# Altium PCB MainBoard.PcbDoc
Units mil, origin at the board's own origin, x right, y up, seen from the top; angles counter-clockwise.
Board outline 1475 x 3530 mil, 8 copper layers (Top Layer, Top VCC, Top GND, Signal_1, Signal_2, Bottom GND, Bottom VCC, Bottom Layer), stack 66.302 mil thick; 64 components, 0 nets, 344 pads, 165 vias.
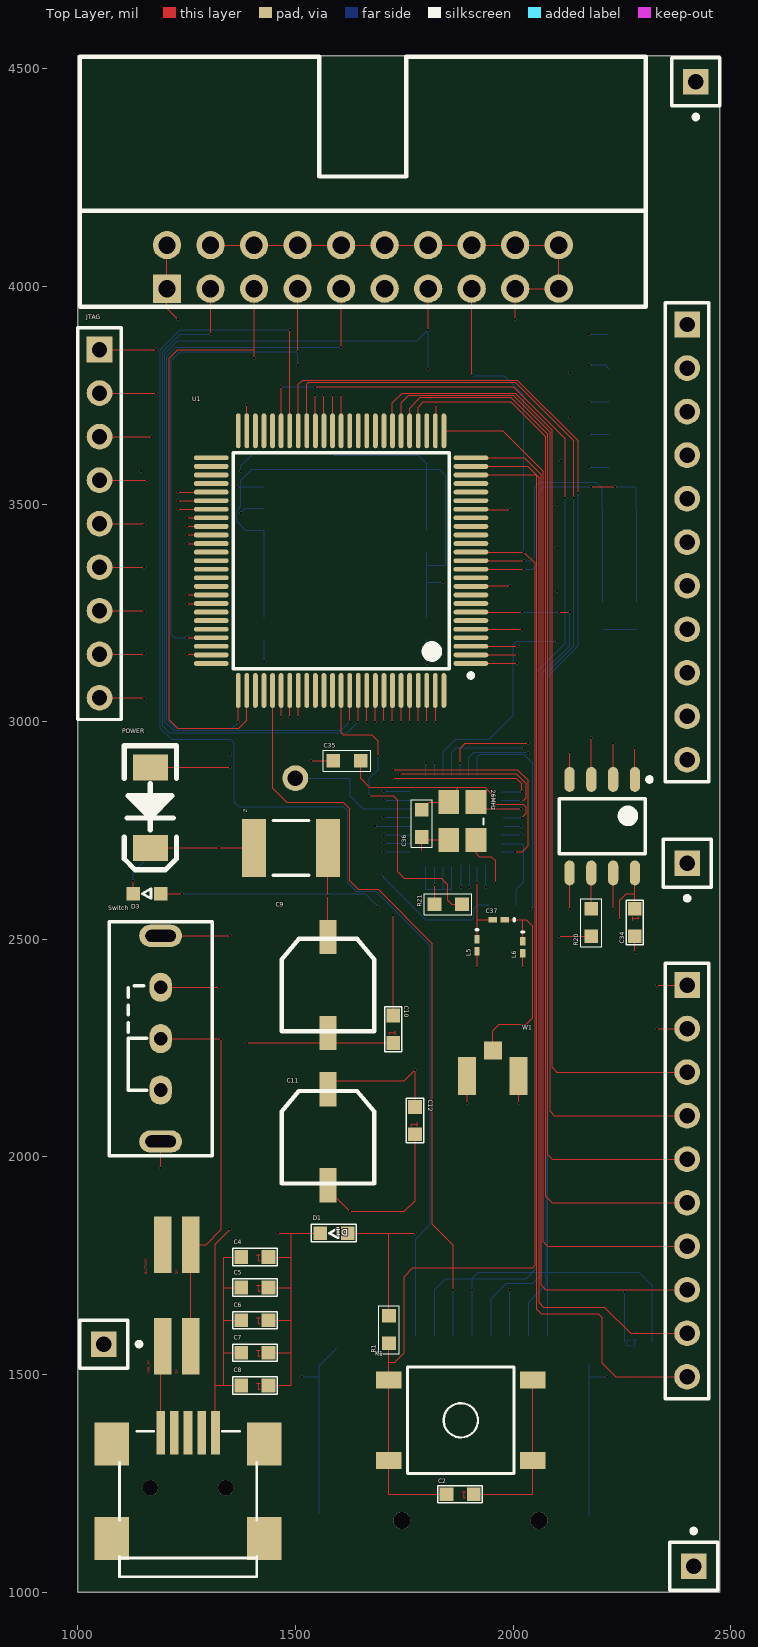
[diagram p0: Top Layer view]
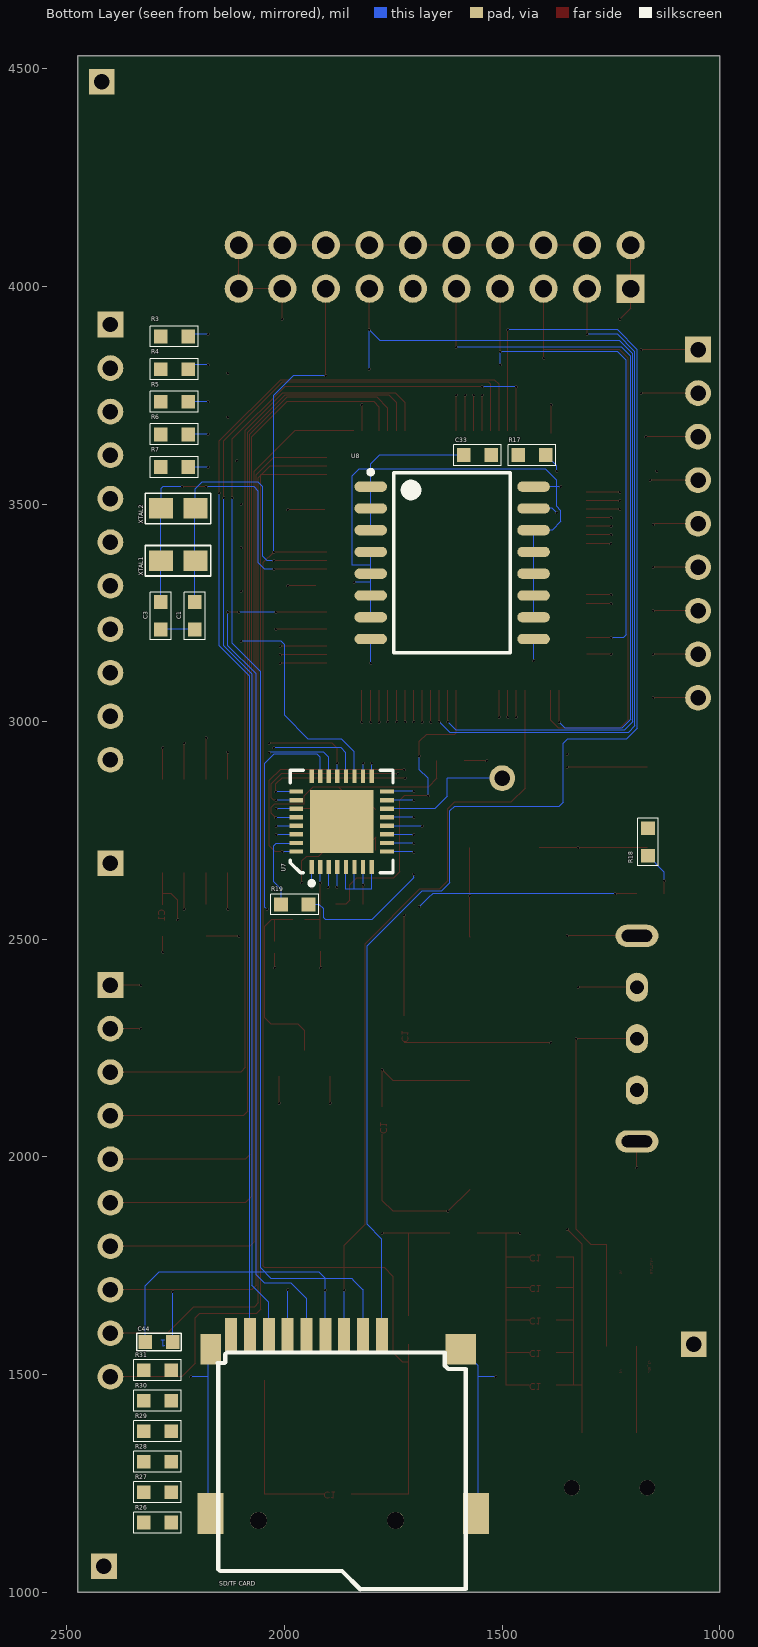
[diagram p1: Bottom Layer view, seen from below]
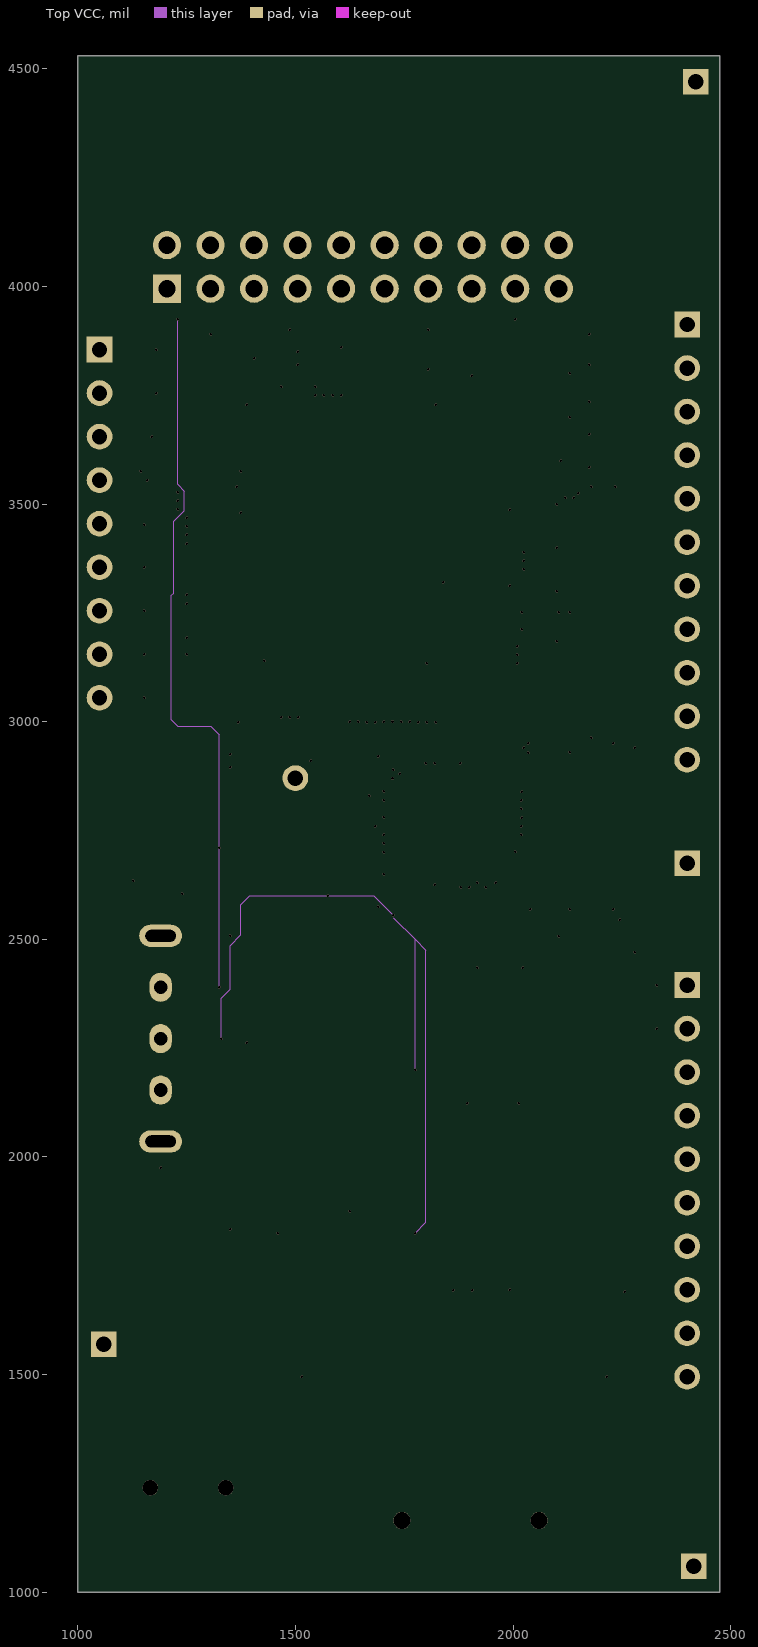
[diagram p2: Top VCC]
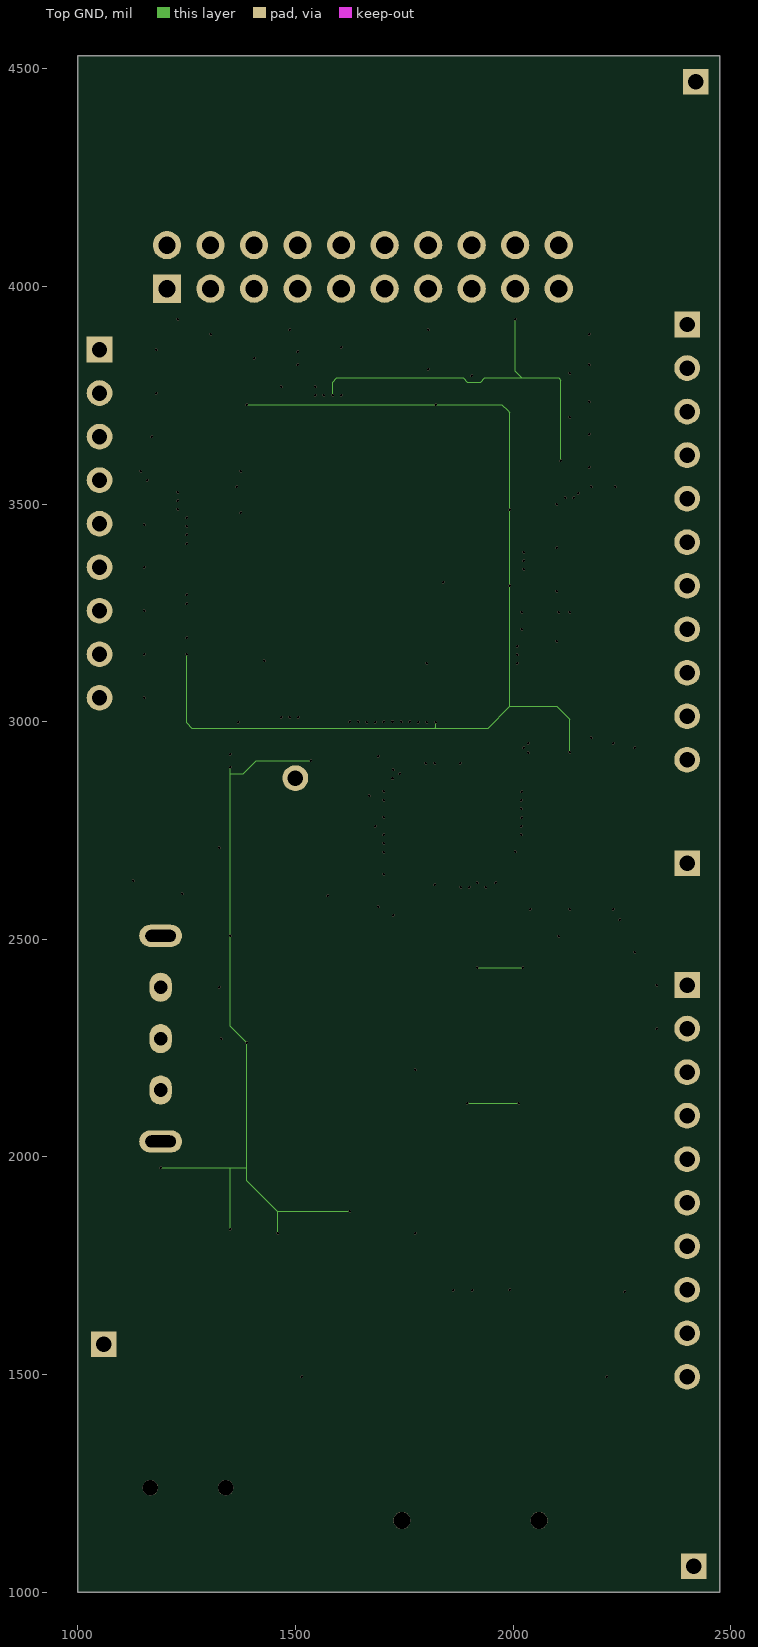
[diagram p3: Top GND]
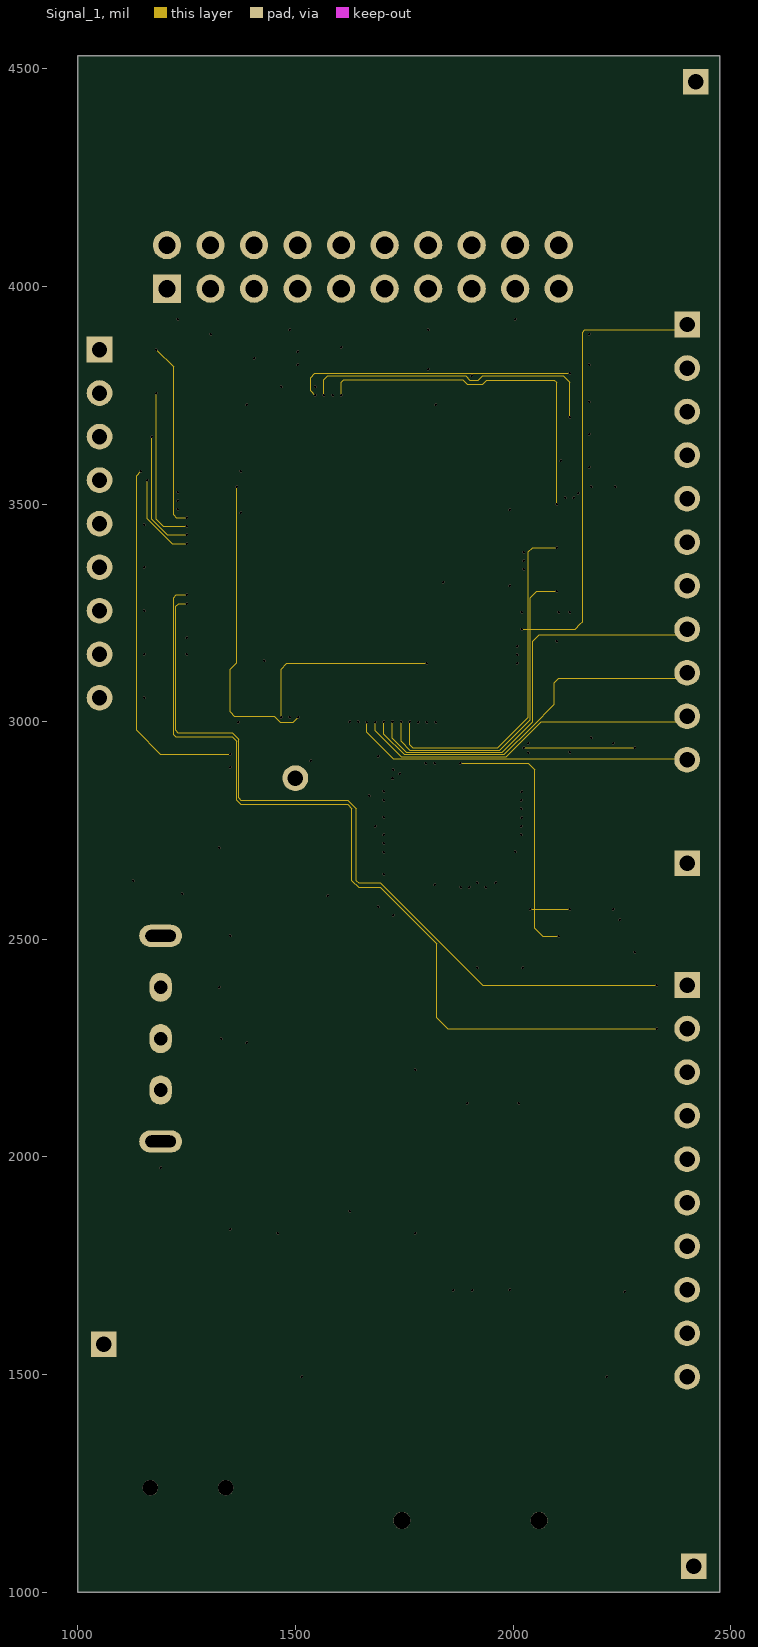
[diagram p4: Signal_1]
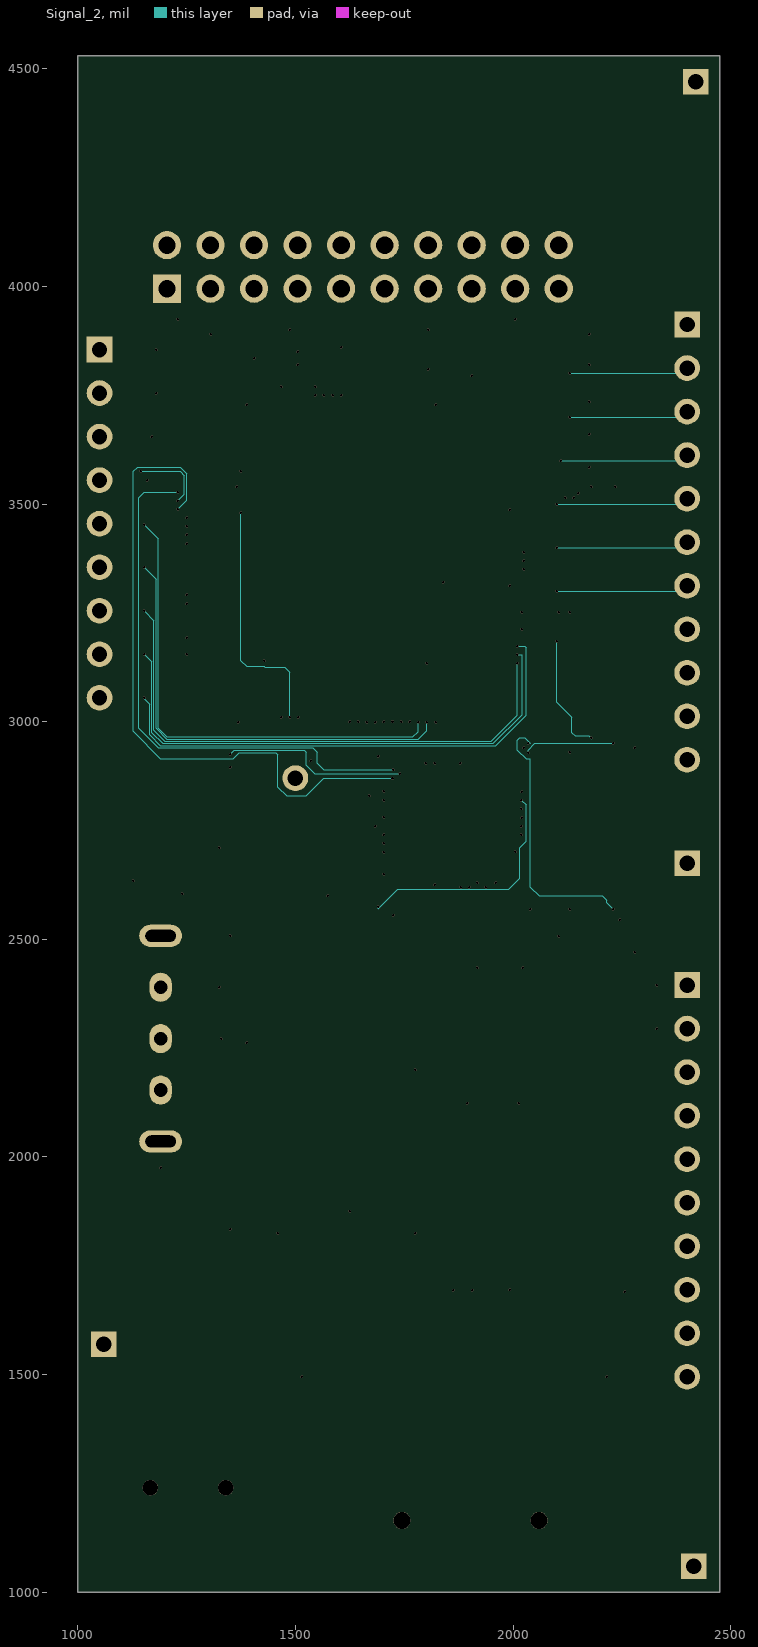
[diagram p5: Signal_2]
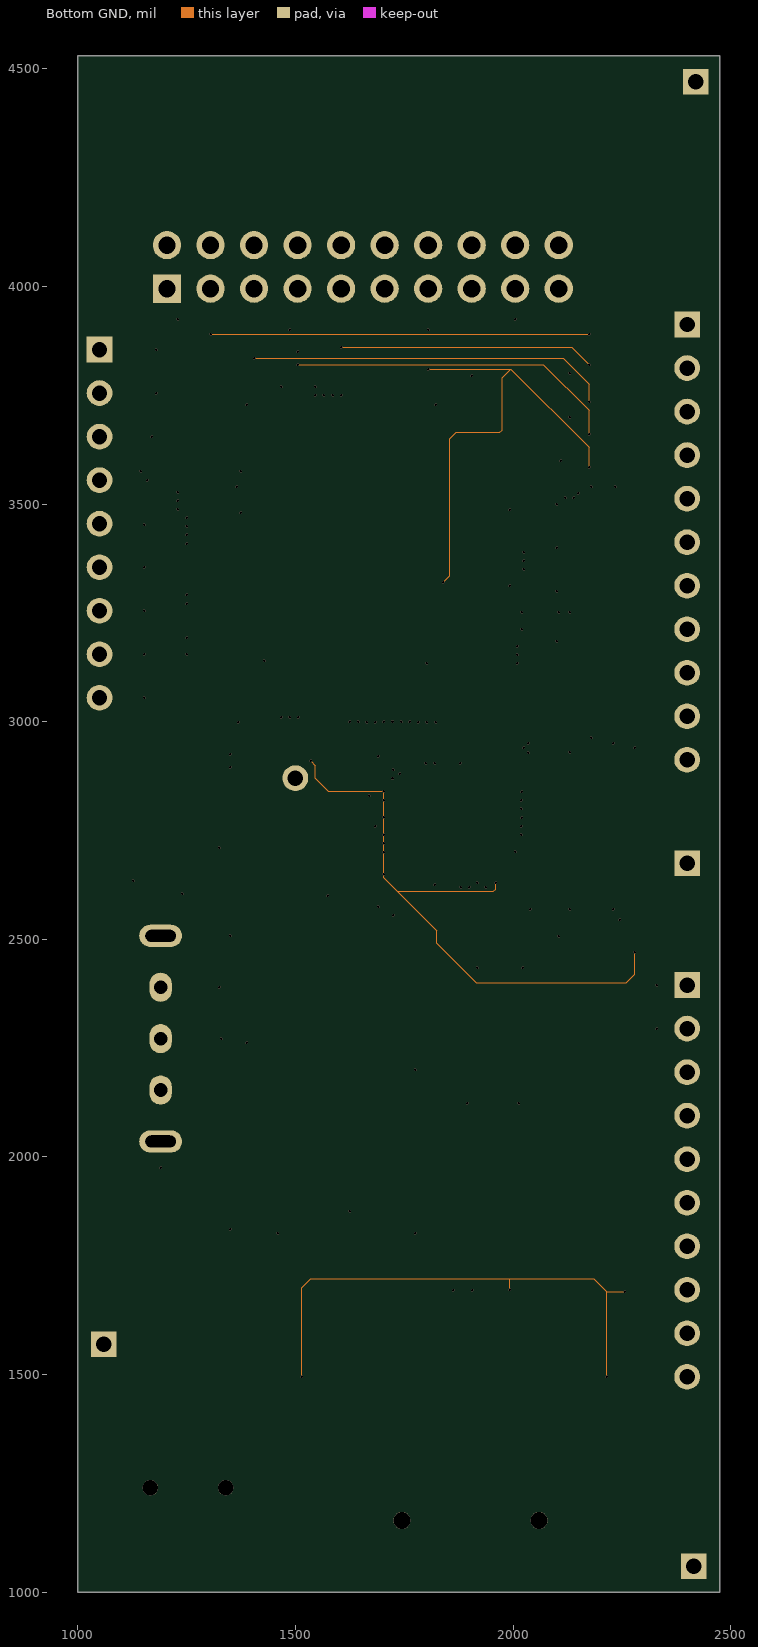
[diagram p6: Bottom GND]
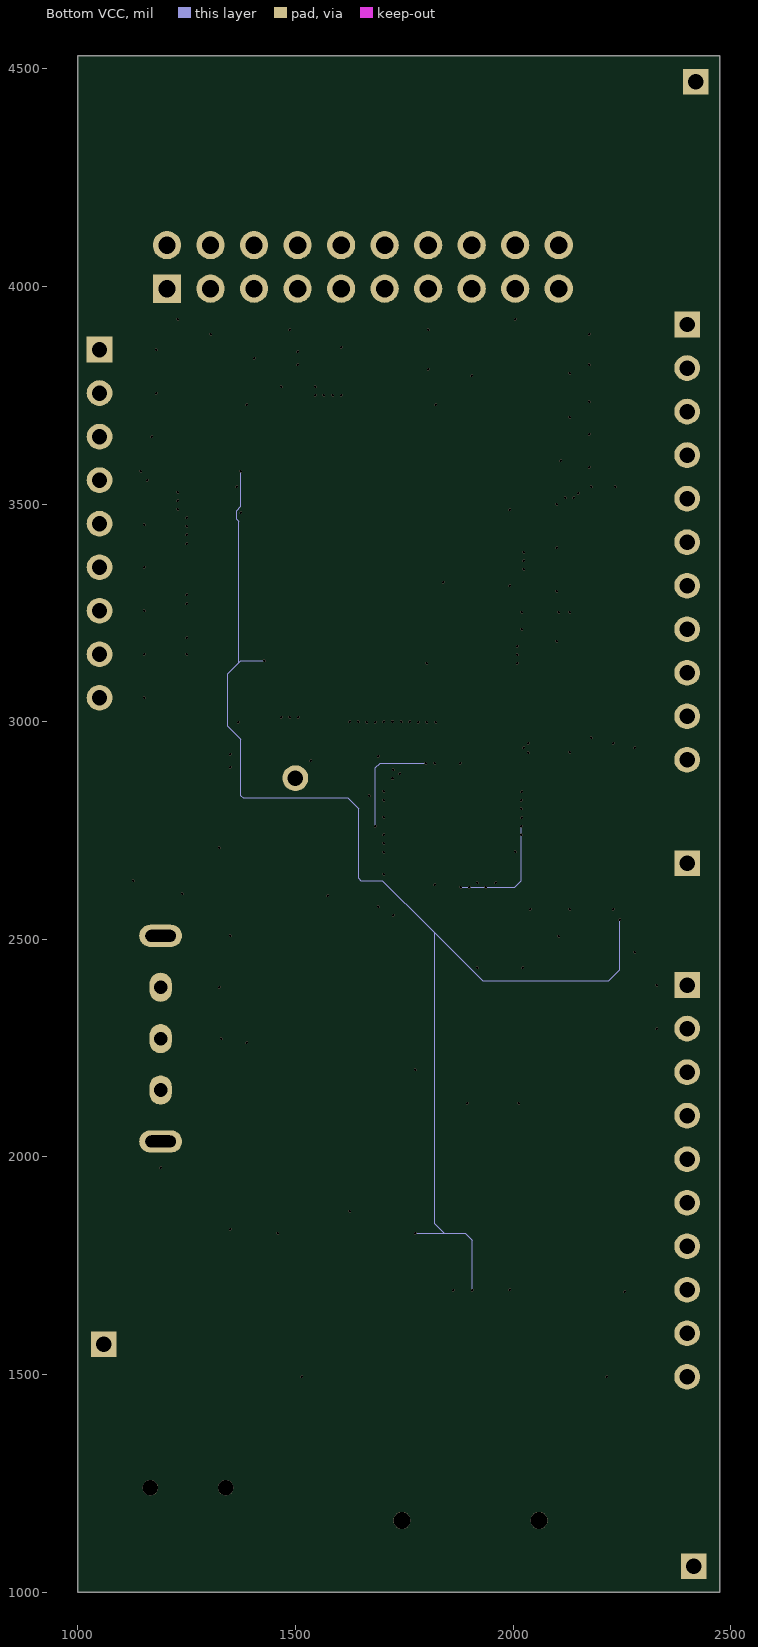
[diagram p7: Bottom VCC]

## Layer stack, top to bottom
Top Solder: solder mask 0.4, Solder Resist, Dk 3.5
Top Layer: signal copper 1.4
Dielectric 1: core 10, FR-4, Dk 4.2
Top VCC: signal copper 1.417
Dielectric 3: core 10, Dk 4.2
Top GND: signal copper 1.417
Dielectric 4: core 10, Dk 4.2
Signal_1: signal copper 1.417
Dielectric 6: prepreg 5, Dk 4.2
Signal_2: signal copper 1.417
Dielectric 7: prepreg 5, Dk 4.2
Bottom GND: signal copper 1.417
Dielectric 5: prepreg 5, Dk 4.2
Bottom VCC: signal copper 1.417
Dielectric 2: core 10, Dk 4.2
Bottom Layer: signal copper 1.4
Bottom Solder: solder mask 0.4, Solder Resist, Dk 3.5

## Board outline
1000,1000 2475,1000 2475,4530 1000,4530

## Design rules (kind name [scope] priority, off if disabled: settings)
Clearance [All] p1: gap=10 ignorepadtopadclearanceinfootprint=FALSE except(0: Arc-Hole Track-Hole SMDPad-Hole THPad-Hole Via-Hole Fill-Hole Poly-Hole Region-Hole Text-Hole)
PolygonConnect [All] p1: connectstyle=Relief reliefconductorwidth=10 reliefentries=4 polygonreliefangle="90 Angle" airgapwidth=10
RoutingVias [All] p1: holewidth=28 width=50 viastyle="Through Hole" minholewidth=28 minwidth=50 maxholewidth=28 maxwidth=50
SolderMaskExpansion [All] p1: expansion=4
Width [All] p1: maxlimit=10 minlimit=10 preferedwidth=10
30 further rules are at their usual default settings.

## Components (designator, comment, footprint, x,y, rotation, side; value= is the part's Value field where it differs from the comment)
26MHz "Comment" NX3225SA 1915,2728.39 r90 top
C1 "Comment" RES_0603_FIRE 2206.02,3275 r270 bottom
C2 "Comment" CAP_0603_FIRE 1910,1225 r180 top
C3 "Comment" RES_0603_FIRE 2284.76,3275 r270 bottom
C4 "Comment" CAP_0603_FIRE 1438.35,1770 r180 top
C5 "Comment" CAP_0603_FIRE 1438.35,1700 r180 top
C6 "Comment" CAP_0603_FIRE 1438.35,1625 r180 top
C7 "Comment" CAP_0603_FIRE 1438.35,1550 r180 top
C8 "Comment" CAP_0603_FIRE 1438.35,1475 r180 top
C9 "Comment" CAP+_47UF_FIRE 1575,2395 r0 top
C10 "Comment" CAP_0603_FIRE 1725,2262.01 r90 top
C11 "Comment" CAP+_47UF_FIRE 1574.65,2045.39 r0 top
C12 "Comment" CAP_0603_FIRE 1775,2052.01 r90 top
C33 "Comment" RES_0603_FIRE 1525,3612.52 r0 bottom
C34 "Comment" CAP_0603_FIRE 2280,2570 r270 top
C35 "Comment" RES_0603_FIRE 1650,2910 r180 top
C36 "Comment" RES_0603_FIRE 1790,2797.99 r270 top
C37 "Comment" 0603 1967.37,2545 r180 top
C44 "Comment" CAP_0603_FIRE 2257.01,1575 r0 bottom
D1 "Comment" LED_RED_0603_FIRE 1620,1825 r180 top
D3 "Comment" LED_BLUE_0603_FIRE 1190.39,2605 r180 top
JTAG "Comment" FC20H 1205,4095 r180 top
K1 "Comment" SW6.2/6.2-SMD 1880,1395 r180 top
L5 "Comment" 0603 1917.37,2486.38 r270 top
L6 "Comment" 0603 2022.37,2481.38 r270 top
POWER "Comment" DO-214 1166.77,2895 r270 top
R1 "Comment" RES_0603_FIRE 1715,1635 r270 top
R3 "Comment" RES_0603_FIRE 2221.5,3885 r0 bottom
R4 "Comment" RES_0603_FIRE 2221.5,3810 r0 bottom
R5 "Comment" RES_0603_FIRE 2221.5,3735 r0 bottom
R6 "Comment" RES_0603_FIRE 2221.5,3660 r0 bottom
R7 "Comment" RES_0603_FIRE 2221.5,3585 r0 bottom
R17 "Comment" RES_0603_FIRE 1400,3612.52 r0 bottom
R18 "Comment" RES_0603_FIRE 1165,2692.01 r90 bottom
R19 "Comment" RES_0603_FIRE 1945,2580 r0 bottom
R20 "Comment" RES_0603_FIRE 2180,2570 r270 top
R21 "Comment" RES_0603_FIRE 1882.68,2580.32 r180 top
R26 "Comment" RES_0603_FIRE 2323.5,1160 r180 bottom
R27 "Comment" RES_0603_FIRE 2323.5,1230 r180 bottom
R28 "Comment" RES_0603_FIRE 2323.5,1300 r180 bottom
R29 "Comment" RES_0603_FIRE 2323.5,1370 r180 bottom
R30 "Comment" RES_0603_FIRE 2323.5,1440 r180 bottom
R31 "Comment" RES_0603_FIRE 2323.5,1510 r180 bottom
"SD/TF CARD" "Comment" TF_CARD 2170.04,1180.75 r180 bottom
Switch "Comment" SW13_6 1190.39,2271.89 r90 top
U1 "Comment" STM32F103VET6-LQFP 1605,3370 r180 top
U7 "Comment" QFN32_1 1868.9,2770.67 r90 bottom
U8 "Comment" W25Q256 1615,3365 r180 bottom
W1 "Comment" UFL-3 1953.59,2185.94 r180 top
XTAL1 "Comment" 3215 2204.76,3370 r0 bottom
XTAL2 "Comment" 3215 2204.76,3490 r0 bottom
? "Comment" PIN1 2400,2675 r180 top
? "Comment" PIN1 1060,1570 r270 top
? "Comment" PIN1 2415,1060 r0 top
? "Comment" PIN1 2420,4470 r180 top
? "Comment" W25Q80BV 2205,2760 r270 top
? "Comment" 1_DIP 1562.99,2870.43 r90 top
? "Comment" HDR1X11 2400,3912.52 r270 top
? "Comment" HDR1X10 2400,2395 r270 top
? "Comment" HDR1X9 1050,3855 r270 top
? "Comment" C1812 1490,2710 r180 top
? "Comment" 1X2PIN_SMD 1259.54,1681.73 r270 top
? "Comment" 1X2PIN_SMD 1194.97,1681.73 r270 top
? "Comment" USB-MINI 1253.39,1240 r180 top

## Footprints (in the part's own frame and the unit in brackets; to place one, negate y for a bottom-side part, rotate by r counter-clockwise, add the part's x,y. Pads: shape width x height; smd on the part's side, far side on the other; paste and mask are expansions set on the pad)
1_DIP [mm]
  round 1.5 hole 0.9: 1(0,1.6)
1X2PIN_SMD [mm]
  rect 3.3x1.02 smd: 1(-2.965,0.011) 2(2.965,0.011)
0603 [mm] "Chip Inductor, Body 0.6x0.3mm, IPC High Density"
  rect 0.5x0.3 smd: 1(-0.35,0) 2(0.35,0)
  silkscreen extent -0.9,-0.05 -0.9,0.05, body extent -0.33,-0.18 0.33,0.18, height 0.55
3215 [mm]
  rect 1.4x1.2 smd: 1(0,0) 2(2,0)
  silkscreen extent -0.89,-0.89 2.92,0.89
C1812 [mm]
  rect 1.4x3.4 smd: 1(-2.15,0) 2(2.15,0)
  silkscreen extent -1.05,-1.6 1.05,1.6
CAP+_47UF_FIRE [mm]
  rect 1x2 smd: 1(0,2.8) 2(0,-2.8)
  silkscreen extent -2.7,-2.7 2.7,2.7
CAP_0603_FIRE [mm]
  rect 0.8x0.8 smd: 1(0,0) 2(1.6,0)
  silkscreen extent -0.5,-0.5 2.1,0.5
DO-214 [mil]
  rect 60x80 smd: 1(0,0) 2(185,0)
  silkscreen extent -50,-60 235,60
FC20H [mil]
  rect 65x65 hole 40: 1(0,100)
  round 65 hole 40: 2(0,0) 3(-100,100) 4(-100,0) 5(-200,100) 6(-200,0) 7(-300,100) 8(-300,0) 9(-400,100) 10(-400,0) 11(-500,100) 12(-500,0) 13(-600,100) 14(-600,0) 15(-700,100) 16(-700,0) 17(-800,100) 18(-800,0) 19(-900,100) 20(-900,0)
  silkscreen extent -1100,-433 200,141
HDR1X9 [mm] "Connector; Header; 9 Position"
  rect 1.5x1.5 hole 0.9: 1(0,0)
  round 1.5 hole 0.9: 2(2.54,0) 3(5.08,0) 4(7.62,0) 5(10.16,0) 6(12.7,0) 7(15.24,0) 8(17.78,0) 9(20.32,0)
  silkscreen extent -1.27,-1.27 21.59,1.27
HDR1X10 [mm] "Connector; Header; 10 Position"
  rect 1.5x1.5 hole 0.9: 1(0,0)
  round 1.5 hole 0.9: 2(2.54,0) 3(5.08,0) 4(7.62,0) 5(10.16,0) 6(12.7,0) 7(15.24,0) 8(17.78,0) 9(20.32,0) 10(22.86,0)
  silkscreen extent -1.27,-1.27 24.13,1.27
HDR1X11 [mm] "Connector; Header; 11 Position"
  rect 1.5x1.5 hole 0.9: 1(0,0)
  round 1.5 hole 0.9: 2(2.54,0) 3(5.08,0) 4(7.62,0) 5(10.16,0) 6(12.7,0) 7(15.24,0) 8(17.78,0) 9(20.32,0) 10(22.86,0) 11(25.4,0)
  silkscreen extent -1.27,-1.27 26.67,1.27
LED_BLUE_0603_FIRE [mm]
  rect 0.8x0.8 smd: A(0,0) K(1.6,0)
  silkscreen extent 0.56,-0.28 1.08,0.28
LED_RED_0603_FIRE [mm]
  rect 0.8x0.8 smd: A(0,0) K(1.6,0)
  silkscreen extent -0.51,-0.51 2.11,0.51
NX3225SA [mm]
  rect 1.4x1.2 smd paste-0.06 mask+0.05: 1(0,0) 2(2.2,0) 3(2.2,1.6) 4(0,1.6)
  silkscreen extent 0.89,-0.43 1.27,-0.43
PIN1 [mm] "Generic Antenna; 1 Lead"
  rect 1.5x1.5 hole 0.9: 1(0,0)
  silkscreen extent -1.4,-1.4 1.4,2.17
QFN32_1 [mm]
  rect 0.8x0.25 smd: 1(-2.65,1.75) 2(-2.65,1.25) 3(-2.65,0.75) 4(-2.65,0.25) 5(-2.65,-0.25) 6(-2.65,-0.75) 7(-2.65,-1.25) 8(-2.65,-1.75) 17(2.65,-1.75) 18(2.65,-1.25) 19(2.65,-0.75) 20(2.65,-0.25) 21(2.65,0.25) 22(2.65,0.75) 23(2.65,1.25) 24(2.65,1.75)
  rect 0.25x0.8 smd: 9(-1.75,-2.65) 10(-1.25,-2.65) 11(-0.75,-2.65) 12(-0.25,-2.65) 13(0.25,-2.65) 14(0.75,-2.65) 15(1.25,-2.65) 16(1.75,-2.65) 25(1.75,2.65) 26(1.25,2.65) 27(0.75,2.65) 28(0.25,2.65) 29(-0.25,2.65) 30(-0.75,2.65) 31(-1.25,2.65) 32(-1.75,2.65)
  rect 3.7x3.7 smd paste-0.49: 33(0,0)
  silkscreen extent -3.72,-3 3,3
RES_0603_FIRE [mm]
  rect 0.8x0.8 smd: 1(0,0) 2(1.6,0)
  silkscreen extent -0.58,-0.61 2.2,0.61
STM32F103VET6-LQFP [mil]
  oval 80x11 smd: 1(-298.23,236.22) 2(-298.23,216.54) 3(-298.23,196.85) 4(-298.23,177.17) 5(-298.23,157.48) 6(-298.23,137.8) 7(-298.23,118.11) 8(-298.23,98.43) 9(-298.23,78.74) 10(-298.23,59.06) 11(-298.23,39.37) 12(-298.23,19.68) 13(-298.23,0) 14(-298.23,-19.69) 15(-298.23,-39.37) 16(-298.23,-59.06) 17(-298.23,-78.74) 18(-298.23,-98.43) 19(-298.23,-118.11) 20(-298.23,-137.8) 21(-298.23,-157.48) 22(-298.23,-177.17) 23(-298.23,-196.85) 24(-298.23,-216.54) 25(-298.23,-236.22) 51(298.23,-236.22) 52(298.23,-216.54) 53(298.23,-196.85) 54(298.23,-177.17) 55(298.23,-157.48) 56(298.23,-137.8) 57(298.23,-118.11) 58(298.23,-98.43) 59(298.23,-78.74) 60(298.23,-59.06) 61(298.23,-39.37) 62(298.23,-19.69) 63(298.23,0) 64(298.23,19.68) 65(298.23,39.37) 66(298.23,59.06) 67(298.23,78.74) 68(298.23,98.43) 69(298.23,118.11) 70(298.23,137.8) 71(298.23,157.48) 72(298.23,177.17) 73(298.23,196.85) 74(298.23,216.54) 75(298.23,236.22)
  oval 11x80 smd: 26(-236.22,-298.23) 27(-216.54,-298.23) 28(-196.85,-298.23) 29(-177.17,-298.23) 30(-157.48,-298.23) 31(-137.8,-298.23) 32(-118.11,-298.23) 33(-98.43,-298.23) 34(-78.74,-298.23) 35(-59.06,-298.23) 36(-39.37,-298.23) 37(-19.68,-298.23) 38(0,-298.23) 39(19.69,-298.23) 40(39.37,-298.23) 41(59.06,-298.23) 42(78.74,-298.23) 43(98.43,-298.23) 44(118.11,-298.23) 45(137.8,-298.23) 46(157.48,-298.23) 47(177.17,-298.23) 48(196.85,-298.23) 49(216.54,-298.23) 50(236.22,-298.23) 76(236.22,298.23) 77(216.54,298.23) 78(196.85,298.23) 79(177.17,298.23) 80(157.48,298.23) 81(137.8,298.23) 82(118.11,298.23) 83(98.43,298.23) 84(78.74,298.23) 85(59.06,298.23) 86(39.37,298.23) 87(19.69,298.23) 88(0,298.23) 89(-19.68,298.23) 90(-39.37,298.23) 91(-59.06,298.23) 92(-78.74,298.23) 93(-98.43,298.23) 94(-118.11,298.23) 95(-137.8,298.23) 96(-157.48,298.23) 97(-177.17,298.23) 98(-196.85,298.23) 99(-216.54,298.23) 100(-236.22,298.23)
  silkscreen extent -303,-248 248,269
SW6.2/6.2-SMD [mm]
  rect 1.5x1 smd: 1(-4.2,2.35) 2(4.2,2.35) 3(-4.2,-2.35) 4(4.2,-2.35)
  silkscreen extent -3.1,-3.1 3.1,3.1
SW13_6 [mm]
  oval 1.7x1.3 hole 0.8: 1(-3,0) 2(0,0) 3(3,0)
  oval 1.3x2.5 hole 0.7 slot 1.778 at 90 deg: 4(-6,0) 5(6,0)
  silkscreen extent -6.83,-3 6.83,3
TF_CARD [mm]
  rect 0.7x2.1 smd: 1(10,10.35) 2(8.9,10.35) 3(7.8,10.35) 4(6.7,10.35) 5(5.6,10.35) 6(4.5,10.35) 7(3.4,10.35) 8(2.3,10.35) 9(1.2,10.35)
  rect 1.2x1.778 smd: 10(0,9.6)
  rect 1.524x2.413 smd: 11(0,0) 12(15.5,0)
  rrect0% 1.778x1.778 smd: 13(14.6,9.6)
  round 1 hole 1: 14(10.8,-0.4) 15(2.8,-0.4)
  silkscreen extent 0.41,-4.42 14.88,9.4
UFL-3 [mm]
  rect 1.05x2.2 smd: 1(-1.5,0) 3(1.5,0)
  rect 1.05x1.05 smd: 2(0,-1.5)
USB-MINI [mm]
  rect 0.508x2.54 smd: 1(1.6,-3.2) 2(0.8,-3.2) 3(0,-3.2) 4(-0.8,-3.2) 5(-1.6,-3.2)
  rect 2.032x2.5 smd: 6(-4.45,-2.55) 7(-4.45,2.95) 8(4.45,2.95) 9(4.45,-2.55)
  round 0.9 hole 0.9 unplated: 10(2.2,0) 11(-2.2,0)
  silkscreen extent -4,-3.3 4,5.2
W25Q80BV [mm]
  oval 1.45x0.6 smd: 1(-2.725,1.905) 2(-2.725,0.635) 3(-2.725,-0.635) 4(-2.725,-1.905) 5(2.725,-1.905) 6(2.725,-0.635) 7(2.725,0.635) 8(2.725,1.905)
  silkscreen extent -2.85,-2.5 1.6,2.88, body extent -3,-2.5 3,2.5, height 1.75
W25Q256 [mm]
  oval 1.9x0.6 smd: 1(-4.75,4.445) 2(-4.75,3.175) 3(-4.75,1.905) 4(-4.75,0.635) 5(-4.75,-0.635) 6(-4.75,-1.905) 7(-4.75,-3.175) 8(-4.75,-4.445) 9(4.75,-4.445) 10(4.75,-3.175) 11(4.75,-1.905) 12(4.75,-0.635) 13(4.75,0.635) 14(4.75,1.905) 15(4.75,3.175) 16(4.75,4.445)
  silkscreen extent -4.88,-5.25 3.4,5.42, body extent -5.16,-5.25 5.16,5.25, height 2.64

## Via types
v1: diameter 5.75, hole 5.75, Top Layer to Bottom Layer, 165 vias

## Nets (pads, with @x,y where several pads share a name; then routed paths per layer and width w, separated by ;. In a path a pad name is that pad's centre, name@x,y a point inside that pad or via, vN(x,y) a via of type N, cw(c..) or ccw(c..) an arc to the next point about the centre after c; other vN are vias at no path point)
pads on no net: 26MHz.1 26MHz.2 26MHz.3 26MHz.4 "SD/TF CARD.1" "SD/TF CARD.2" "SD/TF CARD.3" "SD/TF CARD.4" "SD/TF CARD.5" "SD/TF CARD.6" "SD/TF CARD.7" "SD/TF CARD.8" "SD/TF CARD.9" "SD/TF CARD.10" "SD/TF CARD.11" "SD/TF CARD.12" "SD/TF CARD.13" "SD/TF CARD.14" "SD/TF CARD.15" ?.1 ?.2 ?.3 ?.4 ?.5 ?.6 ?.7 ?.8 ?.9 ?.10 ?.11 C1.1 C1.2 C2.1 C2.2 C3.1 C3.2 C4.1 C4.2 C5.1 C5.2 C6.1 C6.2 C7.1 C7.2 C8.1 C8.2 C9.1 C9.2 C10.1 C10.2 C11.1 C11.2 C12.1 C12.2 C33.1 C33.2 C34.1 C34.2 C35.1 C35.2 C36.1 C36.2 C37.1 C37.2 C44.1 C44.2 D1.A D1.K D3.A D3.K JTAG.1 JTAG.2 JTAG.3 JTAG.4 JTAG.5 JTAG.6 JTAG.7 JTAG.8 JTAG.9 JTAG.10 JTAG.11 JTAG.12 JTAG.13 JTAG.14 JTAG.15 JTAG.16 JTAG.17 JTAG.18 JTAG.19 JTAG.20 K1.1 K1.2 K1.3 K1.4 L5.1 L5.2 L6.1 L6.2 POWER.1 POWER.2 R1.1 R1.2 R3.1 R3.2 R4.1 R4.2 R5.1 R5.2 R6.1 R6.2 R7.1 R7.2 R17.1 R17.2 R18.1 R18.2 R19.1 R19.2 R20.1 R20.2 R21.1 R21.2 R26.1 R26.2 R27.1 R27.2 R28.1 R28.2 R29.1 R29.2 R30.1 R30.2 R31.1 R31.2 Switch.1 Switch.2 Switch.3 Switch.4 Switch.5 U1.1 U1.2 U1.3 U1.4 U1.5 U1.6 U1.7 U1.8 U1.9 U1.10 U1.11 U1.12 U1.13 U1.14 U1.15 U1.16 U1.17 U1.18 U1.19 U1.20 U1.21 U1.22 U1.23 U1.24 U1.25 U1.26 U1.27 U1.28 U1.29 U1.30 U1.31 U1.32 U1.33 U1.34 U1.35 U1.36 U1.37 U1.38 U1.39 U1.40 U1.41 U1.42 U1.43 U1.44 U1.45 U1.46 U1.47 U1.48 U1.49 U1.50 U1.51 U1.52 U1.53 U1.54 U1.55 U1.56 U1.57 U1.58 U1.59 U1.60 U1.61 U1.62 U1.63 U1.64 U1.65 U1.66 U1.67 U1.68 U1.69 U1.70 U1.71 U1.72 U1.73 U1.74 U1.75 U1.76 U1.77 U1.78 U1.79 U1.80 U1.81 U1.82 U1.83 U1.84 U1.85 U1.86 U1.87 U1.88 U1.89 U1.90 U1.91 U1.92 U1.93 U1.94 U1.95 U1.96 U1.97 U1.98 U1.99 U1.100 U7.1 U7.2 U7.3 U7.4 U7.5 U7.6 U7.7 U7.8 U7.9 U7.10 U7.11 U7.12 U7.13 U7.14 U7.15 U7.16 U7.17 U7.18 U7.19 U7.20 U7.21 U7.22 U7.23 U7.24 U7.25 U7.26 U7.27 U7.28 U7.29 U7.30 U7.31 U7.32 U7.33 U8.1 U8.2 U8.3 U8.4 U8.5 U8.6 U8.7 U8.8 U8.9 U8.10 U8.11 U8.12 U8.13 U8.14 U8.15 U8.16 W1.1 W1.2 W1.3 XTAL1.1 XTAL1.2 XTAL2.1 XTAL2.2
copper on no net: | length 120455.8
  Top Layer w2.51: 1050,3055 v1(1152.5,3055) ; 1050,3155 v1(1152.5,3155) ; 1050,3255 v1(1152.5,3255) ; 1050,3355 v1(1152.5,3355) ; 1050,3455 1150,3455 v1(1152.5,3452.5) ; 1050,3555 v1(1160,3555) ; 1050,3655 v1(1170,3655) ; 1050,3755 v1(1180,3755) ; 1050,3855 v1(1180,3855) ; 1127.4,2605 v1(1127.4,2635) ; 1166.77,2710 v1(1325,2710) 1415,2710 ; 1166.77,2895 v1(1350,2895) ; 1190.39,1365.98 1190.39,1565 ; v1(1190.39,1975.39) 1190.39,2035.67 ; 1190.39,2271.89 v1(1330,2271.89) 1330,1833.62 1294.84,1798.46 1259.97,1798.46 1259.97,1565 ; 1190.39,2390 v1(1325,2390) ; 1190.39,2508.11 v1(1350,2508.11) ; 1190.39,2605 v1(1240,2605) ; 1205,4095 1205,3995 1205,3950 v1(1230,3925) ; v1(1230,3488.11) 1306.77,3488.11 ; v1(1230,3507.8) 1306.77,3507.8 ; v1(1230,3527.48) 1306.77,3527.48 ; v1(1250,3155) 1305.24,3155 ; v1(1250,3192.83) 1306.77,3192.83 ; v1(1250,3271.57) 1306.77,3271.57 ; v1(1250,3291.26) 1306.77,3291.26 ; v1(1250,3429.06) 1306.77,3429.06 ; v1(1250,3448.74) 1306.77,3448.74 ; v1(1250,3468.43) 1306.77,3468.43 ; v1(1250.63,3409.37) 1306.77,3409.37 ; v1(1305,3890) 1305,3995 ; 1305,4095 1405,4095 1605,4095 1805,4095 2005,4095 2105,4095 2105,3995 2005,3995 v1(2005,3925) ; 1316.38,1365.98 1316.38,1800 v1(1350,1833.62) ; 1316.38,1475 1335.35,1475 ; 1335.35,1550 1375.35,1550 ; 1335.35,1625 1375.35,1625 ; 1335.35,1700 1375.35,1700 ; v1(1368.78,2998.78) 1368.78,3071.77 ; 1375.35,1475 1335.35,1475 ; 1375.35,1770 1335.35,1770 1335.35,1475 ; 1387.83,3663.23 v1(1387.83,3727.83) ; v1(1387.99,2262.01) 1577.64,2262.01 1725,2262.01 ; 1388.46,3071.77 1388.46,3003.46 1370,2985 1365,2985 1230,2985 1210,3005 1210,3835 1230,3855 1405,3855 ; v1(1405,3835) 1405,3855 ; 1405,3995 1405,3855 ; 1438.35,1475 1490.35,1475 1490.35,1770 ; 1438.35,1550 1490.35,1550 ; 1438.35,1625 1490.35,1625 ; 1438.35,1700 1490.35,1700 ; 1438.35,1770 1490.35,1770 ; 1447.52,3071.77 1447.52,2960 1447.52,2847.48 1480,2815 1610,2815 1625,2800 1625,2634.68 1644.68,2615 1690,2615 1815,2490 1815,1845 1862.95,1797.05 v1(1862.95,1693.74) ; v1(1460,1825) 1557.01,1825 ; v1(1467.2,3010) 1467.2,3071.77 ; 1467.2,3668.23 1467.2,3740 v1(1467.2,3770) ; v1(1486.89,3010) 1486.89,3071.77 ; 1487.2,3668.23 v1(1487.2,3900) ; 1490.35,1824.65 1490.35,1770 ; v1(1505,3850) 1505,3995 ; v1(1506.57,3010) 1506.57,3071.77 ; 1506.57,3668.23 1506.57,3740 1506.57,3775 1516.57,3785 1540,3785 2010,3785 2150,3645 v1(2150,3525) ; 1526.26,3668.23 1526.26,3740 1526.26,3775 1531.26,3780 2005,3780 2140,3645 v1(2140,3515) ; v1(1535,2910) 1587.01,2910 ; 1545.94,3668.23 v1(1545.94,3750) ; v1(1545.94,3770) 2000,3770 2120,3650 v1(2120,3515) ; 1565.63,3668.23 v1(1565.63,3750) ; 1574.65,2175 1750,2175 v1(1775,2200) 1775,2115 ; 1574.65,2710 1574.65,2505.59 1575,2505.24 ; 1575,1925 v1(1625,1875) 1750,1875 1775,1900 1775,2052.01 ; 1585.31,3668.23 v1(1585.31,3750) ; 1605,3071.77 1605,2999.68 1605,2975 1610,2970 1675,2970 1690,2955 v1(1690,2920.16) ; 1605,3668.23 v1(1605,3750) ; v1(1605,3860) 1605,3995 ; 1620,1825 v1(1775,1825) ; v1(1624.68,2999.68) 1624.68,3071.77 ; v1(1644.37,2999.68) 1644.37,3071.77 ; 1650,2910 1650,2870 1670,2850 1875,2850 ; v1(1664.06,2998.78) 1664.06,3071.77 ; v1(1670,2830) 1725,2830 1735,2820 1735,2655 1750,2640 1835,2640 1850,2625 1850,2590 1859.68,2580.32 1882.68,2580.32 ; v1(1683.74,2998.78) 1683.74,3071.77 ; v1(1703.43,3000) 1703.43,3071.77 ; 1714.82,1528.76 1728.76,1528.76 1750,1550 1750,1725 1770,1745 2045,1745 2050,1750 2050,3364.69 v1(2025,3389.69) 1903.23,3389.69 ; 1715,1570 1714.65,1487.52 1714.65,1302.48 1714.65,1225 1847.01,1225 ; 1715,1635 1715,1825 ; v1(1723.11,2870.43) 2006.85,2870.43 2020,2857.28 v1(2020,2839.57) ; v1(1723.11,3000) 1723.11,3071.77 ; 1723.11,3668.23 1723.11,3733.11 1745,3755 2005,3755 2090,3670 2090,2205.63 2100.63,2195 2400,2195 ; 1725,2325 v1(1725,2555) 1725,2550 ; v1(1725,2890) 2010,2890 2035,2865 2035,2715 2021.77,2701.77 v1(2005,2701.77) ; v1(1740,2880) 2007.64,2880 2030,2857.64 2030,2825 2024.88,2819.88 v1(2019.06,2819.88) ; v1(1742.8,3000) 1742.8,3071.77 ; 1742.8,3668.23 1742.8,3732.8 1760,3750 2000,3750 2085,3665 2085,3035 2085,2105 2095,2095 2400,2095 ; v1(1762.48,3000) 1762.48,3071.77 ; 1762.48,3668.23 1762.48,3720.28 1787.2,3745 1995,3745 2080,3660 2080,2675 2080,2005 2090,1995 2400,1995 ; v1(1782.17,2998.78) 1782.17,3071.77 ; 1782.17,3668.23 1782.17,3722.83 1794.33,3735 1995,3735 2075,3655 2075,1910 2090,1895 2400,1895 ; 1790,2705 1790,2735 1796.61,2728.39 1852.01,2728.39 ; 1790,2797.99 1807.01,2815 1852.01,2815 1852.01,2827.01 1875,2850 ; v1(1801.85,2998.78) 1801.85,3071.77 ; v1(1805,3900) 1805,3995 ; 1819.68,2580.32 v1(1819.68,2625.94) ; v1(1822.17,2998.78) 1822.17,3072.09 ; v1(1822.17,3727.83) 1822.83,3668.23 ; 1841.22,3668.23 1976.77,3668.23 2070,3575 2070,1805 2080,1795 2400,1795 ; v1(1878.74,2905) 1878.74,2938.74 1890,2950 v1(2035,2950) ; v1(1894.53,2122.91) 1894.53,2185.94 ; 1903.23,3133.78 2000,3133.78 v1(2010,3133.78) ; 1903.23,3153.46 v1(2010,3153.46) ; 1903.23,3173.15 v1(2010,3173.15) ; 1903.23,3212.52 v1(2020,3212.52) ; 1903.23,3251.89 v1(2020,3251.89) ; 1903.23,3350.32 v1@2025,3350.32 ; 1903.23,3370 v1(2025,3370) ; 1903.23,3566.85 2055,3566.85 2055,1650 2065,1640 2195.63,1640 2205,1630.63 2205,1525.63 2235.63,1495 2400,1495 ; 1903.23,3586.54 2033.46,3586.54 2060,3560 2060,1665 2070,1655 2210,1655 2270,1595 2400,1595 ; 1903.23,3606.22 2025.63,3606.22 2065,3566.85 2065,1705 2075,1695 2400,1695 ; v1(1905,3795) 1905,3995 ; 1908.23,3487.17 v1(1992.83,3487.17) ; 1910,1225 2045,1225 2045,1302.13 2045.35,1302.48 2045.35,1487.52 ; 1915,2728.39 1915,2697.37 1922.37,2690 1950,2690 1960,2680 v1(1960,2630) ; 1915,2815 1929.8,2800.2 v1(2019.06,2800.2) ; v1(1917.37,2435) 1917.37,2472.6 ; 1918.11,2500.9 v1(1918.11,2630) ; 1918.11,2545 1953.59,2545 ; 1928.03,3312.17 v1(1992.83,3312.17) ; 1953.59,2245 1953.59,2290 1968.59,2305 2030,2305 2045,2320 2045,2530 2030,2545 2022.37,2545 ; 1981.14,2545 2022.37,2545 ; v1(2012.64,2122.91) 2012.64,2185.94 ; v1(2020,2779.88) 2030,2789.88 2030,2803.46 2023.46,2810 1955,2810 1955,2830 1935,2850 1875,2850 ; v1(2022.37,2435) 2022.37,2467.6 ; 2022.37,2495.16 2022.37,2545 ; v1(2105,2507.01) 2180,2507.01 ; v1(2105,3251.89) v1(2130,3251.89) ; v1(2130,2568.86) 2130,2652.72 ; 2130,2867.28 v1(2130,2930) ; 2180,2580.32 2180,2652.72 ; 2180,2867.28 2180,2929.06 v1(2180,2963.15) ; v1(2180,3540) v1(2235,3540) ; v1(2230,2568.86) 2230,2652.72 ; 2230,2867.28 v1(2230,2950) ; v1(2245,2545) 2245,2590 2260,2605 2280,2605 ; v1(2280,2470) 2280,2507.01 ; 2280,2580 2280,2652.72 ; 2280,2867.28 v1(2280,2940) ; v1(2330,2295) 2400,2295 ; v1(2330,2395) 2400,2395
  Top VCC w2.51: v1(1230,3925) 1230,3830 1230,3545 1245,3530 1245,3485 1220,3460 1220,3295 1215,3290 1215,3005 1230,2990 1305,2990 1325,2970 v1(1325,2710) v1(1325,2390) ; v1(1330,2271.89) 1330,2365 1350,2385 1350,2485 1375,2510 1375,2580 1395,2600 v1(1574.65,2600) 1680,2600 v1(1725,2555) ; 1725,2550 1775,2500 ; v1(1775,1825) 1800,1850 1800,2475 1775,2500 ; v1(1775,2200) 1775,2500
  Top GND w2.51: v1(1190.39,1975.39) 1387.6,1975.39 ; v1@1250,3152.83 1250,2997.17 1262.17,2985 1819.68,2985 ; v1(1350,1833.62) 1350,1975 ; 1350,2880 1380,2880 1410,2910 v1(1535,2910) ; v1(1350,2895) v1(1350,2508.11) 1350,2300 v1(1387.99,2262.01) 1387.99,1945 1459,1874 ; v1(1387.83,3727.83) 1974.54,3727.83 1987.37,3715 1992.83,3709.54 v1(1992.83,3487.17) v1(1992.83,3312.17) 1992.83,3035.32 ; v1(1460,1825) 1460,1875 v1(1625,1875) ; v1(1585.31,3750) 1585.31,3780.31 1595,3790 1885.31,3790 1895,3780.31 1925.31,3780.31 1935,3790 2105,3790 2110,3785 v1(2110,3600) ; v1(1822.17,2998.78) 1822.17,2987.48 1819.68,2985 ; v1(1894.53,2122.91) v1(2012.64,2122.91) ; v1(1917.37,2435) v1(2022.37,2435) ; v1(2005,3925) 2005,3805 2020,3790 ; v1(2130,2930) 2130,3005.32 2100,3035.32 1992.83,3035.32 ; 1819.68,2985 1942.52,2985 1992.83,3035.32
  Bottom GND w2.51: v1(1305,3890) 1640,3890 v1(2175,3890) ; v1(1405,3835) 2115,3835 2175,3775 v1(2175,3735) ; v1(1505,3820) 2070,3820 2175,3715 v1(2175,3660) ; v1(1515,1495) 1515,1700 1535,1720 1870,1720 2185,1720 2215,1690 ; v1(1535,2910) 1545.94,2899.06 1545.94,2870 1575.94,2840 v1(1703.43,2840) v1(1703.43,2780.94) v1(1703.43,2700.51) v1(1703.43,2650) 1703.43,2641.57 1825,2520 1825,2491.06 1916.06,2400 2260,2400 2280,2420 v1(2280,2470) ; v1(1605,3860) 1640,3860 2135,3860 v1(2175,3820) ; 1735,2610 1955,2610 1960,2615 v1(1960,2630) ; v1(1805,3810) 1995,3810 ; v1(1840,3320) 1855,3335 1855,3650 1870,3665 1970,3665 1975,3670 1975,3790 1995,3810 ; v1(1992.87,1694.96) 1992.87,1720 ; v1(2175,3585) 2175,3630 1995,3810 ; v1(2215,1495) 2215,1690 ; v1(2257.01,1690) 2215,1690
  Bottom VCC w2.51: 1370,3135 1370,3168.78 1370,3460 1365,3465 1365,3485 1375,3495 v1(1375,3575) ; v1(1427.99,3140) 1375,3140 1345,3110 1345,2990 1375,2960 1375,2830 1380,2825 1620,2825 1645,2800 1645,2640 1650,2635 1700,2635 1805,2530 1820,2515 ; v1(1683.74,2760) 1683.74,2893.74 1695,2905 v1(1800,2905) ; v1(1775,1825) 1890,1825 ; v1(1880,2620) v1(1900,2620) v1(1937.8,2620) 2004.06,2620 2019.06,2635 v1(2019.06,2759.68) ; v1(1906.26,1693.74) 1906.26,1808.74 1890,1825 ; v1(2245,2545) 2245,2430 2220,2405 1930,2405 1820,2515 ; 1820,2515 1820,1847.17 1842.17,1825 1890,1825
  Signal_1 w2.51: v1(1145,3575) 1135,3565 1135,2980 1190,2925 v1(1350,2925) ; v1(1160,3555) 1160,3550 1160,3466.77 1217.4,3409.37 v1(1250.63,3409.37) ; v1(1170,3655) 1170,3465 1205.94,3429.06 v1(1250,3429.06) ; v1(1180,3755) 1180,3725 1180,3465 1196.26,3448.74 v1(1250,3448.74) ; v1(1180,3855) 1220,3815 1220,3475 1226.57,3468.43 v1(1250,3468.43) ; v1(1250,3271.57) 1231.57,3271.57 1225,3265 1225,2980 1230,2975 1355,2975 1370,2960 1370,2825 1375,2820 1620,2820 1640,2800 1640,2635 1645,2630 1695,2630 1930,2395 v1(2330,2395) ; v1(1250,3291.26) 1226.26,3291.26 1220,3285 1220,3025 1220,2970 1225,2965 1355,2965 1365,2955 1365,2820 1375,2810 1620,2810 1630,2800 1630,2635 1645,2620 1695,2620 1825,2490 1825,2320 1850,2295 v1(2330,2295) ; v1(1365,3540) 1365,3135 1350,3120 1350,3022.52 1360,3012.52 1451.26,3012.52 1465,2998.78 1495.35,2998.78 v1(1506.57,3010) ; v1(1467.2,3010) 1467.2,3120.98 1480,3133.78 v1(1801.85,3133.78) ; v1(1545.94,3750) 1545,3750 1535,3760 1535,3790 1545,3800 1615,3800 v1(2130,3800) ; v1(1565.63,3750) 1565.63,3785.98 1574.65,3795 1890.98,3795 1900.98,3785 1920,3785 1930,3795 2115,3795 2130,3780 v1(2130,3700) ; v1(1605,3750) 1605,3780 1610.98,3785.98 1884.02,3785.98 1895,3775 1930,3775 1940,3785 2095,3785 2100,3780 v1(2100,3500) ; v1(1664.06,2998.78) 1664.06,2975.94 1725,2915 1988.43,2915 2385,2915 2400,2900 ; v1(1683.74,2998.78) 1683.74,2979.06 1742.8,2920 1985,2920 2045,2980 2065,3000 2400,3000 ; v1(1703.43,3000) 1703.43,2971.57 1750,2925 1980,2925 2045,2990 2095,3040 2095,3090 2105,3100 2400,3100 ; v1(1723.11,3000) 1723.11,2961.89 1755,2930 1975,2930 2045,3000 2045,3185.2 2059.8,3200 2400,3200 ; v1(1742.8,3000) 1742.8,2954.69 1762.48,2935 1970,2935 2040,3005 2040,3020 2040,3285 2055,3300 v1(2100,3300) ; v1(1762.48,3000) 1762.48,2947.52 1770,2940 1965,2940 2035,3010 2035,3170 2035,3390 2045,3400 v1(2100,3400) ; v1(1878.74,2905) 2035,2905 2050,2890 2050,2525 2067.99,2507.01 v1(2105,2507.01) ; v1(2020,3212.52) 2142.52,3212.52 2155,3225 2160,3230 2160,3895 2165,3900 2400,3900 ; v1(2025,2940) v1(2280,2940) ; v1(2040,2568.86) v1(2130,2568.86)
  Signal_2 w2.51: v1(1145,3575) 1235,3575 1245,3565 1245,3522.8 v1(1230,3507.8) ; v1@1150,3055 1165,3040 1165,2970 1190,2945 1960,2945 2030,3015 2030,3170 2026.85,3173.15 2021.85,3173.15 v1(2010,3173.15) ; v1(1152.5,3155) 1170,3137.5 1170,2975 1195,2950 1955,2950 2021.54,3016.54 2021.54,3153.46 v1(2010,3153.46) ; v1(1152.5,3255) 1175,3232.5 1175,2980 1200,2955 1950,2955 2010,3015 v1(2010,3133.78) ; v1(1152.5,3355) 1180,3327.5 1180,2985 1205,2960 1782.17,2960 1801.85,2979.69 v1(1801.85,2998.78) ; v1(1152.5,3452.5) 1185,3420 1185,2985 1205,2965 1405,2965 1770,2965 1782.17,2977.17 v1(1782.17,2998.78) ; v1(1230,3488.11) 1250.63,3508.74 1250.63,3570 1235.63,3585 1137.5,3585 1127.4,3574.9 1127.4,2977.6 1190,2915 1357.48,2915 1371.54,2929.06 1455,2929.06 1460,2924.06 1460,2850 1480,2830 1525,2830 1565.43,2870.43 v1(1723.11,2870.43) ; v1(1230,3527.48) 1152.48,3527.48 1140,3515 1140,2985 1185,2940 1540,2940 1550,2930 1550,2905 1565,2890 v1(1725,2890) ; v1(1350,2925) 1360,2935 1520,2935 1525,2930 1525,2900 1545,2880 1555,2880 v1(1740,2880) ; v1(1375,3480) 1375,3462.2 1375,3140 1387.99,3127.01 1427.99,3127.01 1430,3125 1475,3125 1486.89,3113.11 v1(1486.89,3010) ; v1(1690,2575) 1690,2570 1735,2615 1745,2615 1990,2615 2015,2640 2015,2710 2030,2725 2030,2808.94 v1(2019.06,2819.88) ; v1(2035,2929.06) 2035,2935 2050,2950 v1(2230,2950) ; v1(2035,2950) 2040,2950 2026.85,2963.15 2015.79,2963.15 2010,2957.36 2010,2935 2030,2915 2040,2915 2040,2620 2060,2600 2205,2600 2215,2590 2215,2583.86 v1(2230,2568.86) ; v1(2100,3185) 2100,3170 2100,3045 2135,3010 2135,2975 2142.64,2967.36 2173.82,2967.36 v1@2180,2961.18 ; v1(2100,3300) 2400,3300 ; v1(2100,3400) 2400,3400 ; v1(2100,3500) 2400,3500 ; v1(2110,3600) 2400,3600 ; v1(2130,3700) 2400,3700 ; v1(2130,3800) 2400,3800
  Bottom Layer w2.51: v1(1127.4,2635) 1127.4,2654.41 1165,2692.01 ; v1(1240,2605) 1660,2605 1670,2595 v1(1690,2575) ; v1(1250,3192.83) 1222.17,3192.83 1215,3200 1215,3830 1235,3850 v1(1505,3850) v1(1505,3820) ; v1(1305,3890) 1235,3890 1195,3850 1195,2990.39 1210.39,2975 1619.68,2975 v1(1644.37,2999.68) ; v1(1365,3540) 1427.99,3540 ; v1(1368.78,2998.78) 1355,2985 1225.32,2985 1205,3005.32 1205,3840 1225,3860 1590,3860 v1(1605,3860) ; v1(1375,3480) 1385,3490 1427.99,3490 ; v1(1375,3575) 1375,3587.52 1400,3612.52 ; v1(1427.99,3140) 1427.99,3190 ; 1427.99,3240 1427.99,3440 1385,3440 1365,3460 1365,3485 1375,3495 1375,3555 1400,3580 1830,3580 1845,3565 1845,3360 1802.01,3360 ; v1(1467.2,3770) v1(1545.94,3770) ; v1(1487.2,3900) 1235,3900 1190,3855 1190,2985.39 1215.39,2960 1350,2960 1360,2950 1360,2815 1370,2805 1610,2805 1620,2795 1620,2630 1640,2610 1685,2610 1810,2485 1810,2475 1810,1845 1776.34,1811.34 1776.34,1695 1776.34,1588.23 ; 1500,2870.43 1625.83,2870.43 1625.83,2829.17 1654.8,2800.2 1715,2800.2 1725,2800.2 1733.62,2800.2 1764.57,2800.2 ; v1(1515,1495) 1555,1495 ; 1555,1180 1555,1520 1595,1560 ; 1587.99,3612.52 1782.48,3612.52 1802.01,3592.99 1802.01,3540 1802.01,3490 1802.01,3440 ; v1(1624.68,2999.68) 1605,2980 1220,2980 1200,3000 1200,3845 1230,3875 1780,3875 v1(1805,3900) v1(1805,3810) ; v1(1670,2830) 1670,2870 1690,2890 v1(1690,2920.16) ; v1(1683.74,2760) 1763.74,2760 ; v1(1703.43,2650) 1703.43,2641.57 1800,2545 1905,2545 1910,2550 1910,2570 1920,2580 1945,2580 ; v1(1703.43,2720.63) 1763.74,2720.63 ; v1(1703.43,2740) 1763.74,2740 ; v1(1703.43,2780.94) 1763.74,2780.94 ; v1(1703.43,2820) 1763.74,2820 ; v1(1703.43,2840) 1763.74,2840 ; v1@1703.86,2700.94 1763.74,2700.94 ; 1800,2666.34 1800,2615 1839.37,2615 ; 1800,2875 v1(1800,2905) ; v1(1801.85,3133.78) 1802.01,3190 ; 1802.01,3240 1802.01,3390 ; 1802.01,3320 v1(1840,3320) ; 1819.65,1588.23 1819.65,1695 1820,1695 1840,1715 1845,1720 2030,1720 2055,1745 2055,2115 2055,3115 2120,3180 v1(2120,3515) ; v1(1819.68,2625.94) 1819.68,2666.34 ; 1819.68,2875 v1(1819.68,2904.68) ; 1839.37,2666.34 1839.37,2615 ; 1839.37,2875 1839.37,2930.47 1868.9,2960 1945,2960 2000,3015 2000,3177.01 2007.99,3185 v1(2100,3185) ; 1859.06,2666.34 1859.06,2615 1839.37,2615 ; 1859.06,2875 1859.06,2905 1859.06,2920.16 1859.06,2929.06 1870,2940 v1(2025,2940) ; 1862.95,1588.23 v1(1862.95,1693.74) ; 1878.74,2875 v1(1878.74,2905) ; 1879.68,2671.34 v1(1880,2620) ; 1898.43,2875 1898.43,2918.43 1910,2930 v1@2035,2930 ; 1899.68,2671.34 v1(1900,2620) ; v1(1905,3795) 1980,3795 2025,3750 2025,3450 v1(2025,3389.69) ; 1906.26,1588.23 v1(1906.26,1693.74) 1906.26,1721.26 1920,1735 2288.74,1735 2320,1703.74 2320,1575 ; v1(1918.11,2630) 1918.11,2666.34 ; 1918.11,2875 1918.11,2918.11 1925,2925 2025,2925 2045,2905 2045,2573.86 v1(2040,2568.86) ; v1@1937.48,2620 1937.48,2671.34 ; 1949.57,1588.23 1949.57,1674.57 1985,1710 2045,1710 2065,1730 2065,2410 2065,3110 2130,3175 2130,3255 ; 1973.23,2701.77 v1(2005,2701.77) ; 1973.23,2720 2020,2720 2025,2715 2025,2632.01 2007.99,2615 2007.99,2580 ; 1973.23,2741.14 1974.37,2740 v1(2019.06,2740) ; 1973.23,2800.2 v1(2019.06,2800.2) ; 1973.23,2819.88 v1(2019.06,2819.88) ; 1973.23,2839.57 v1(2020,2839.57) ; 1977.28,2779.88 v1(2020,2779.88) ; 1978.66,2759.68 v1(2019.06,2759.68) ; 1992.87,1588.23 v1(1992.87,1694.96) ; v1(2020,3251.89) v1(2105,3251.89) ; v1(2025,3350) 2045,3350 2060,3365 2060,3530 2070,3540 v1(2180,3540) ; v1(2025,3370) 2040,3370 2050,3380 2050,3540 2060,3550 2190,3550 2204.76,3535.24 2204.76,3490 ; 2036.18,1588.23 2036.18,1666.18 2065,1695 2075,1705 2075,3110 2140,3175 v1(2140,3515) ; 2079.49,1588.23 2079.49,1695 2079.49,3104.49 2150,3175 v1(2150,3525) ; 2175,1175 2175,1495 ; 2175,1525 2175,1495 ; v1(2175,3585) 2221.5,3585 ; v1(2175,3660) 2221.5,3660 ; v1(2175,3735) 2221.5,3735 ; v1(2175,3820) 2211.5,3820 2221.5,3810 ; v1(2175,3890) 2216.5,3890 ; 2206.02,3212.01 2284.76,3212.01 ; 2206.02,3275 2206.02,3370 2206.02,3490 ; v1(2215,1495) 2175,1495 ; v1(2235,3540) 2280,3540 2283.5,3536.5 2283.5,3490 ; 2257.01,1575 v1(2257.01,1690) ; 2284.76,3275 2284.76,3370 2284.76,3490
  other v1: 2100,3500 2130,3700

## Other copper
Top Layer:
  text "BATTARY" at 1159.97,1730.24 h6 r90
  text "5V" at 1229.97,1730.24 h6 r90
  text "USB_5V" at 1164.97,1501.73 h6 r90
  text "5V" at 1229.97,1501.73 h6 r90

## Silkscreen, mask and mechanical layers (free items; w line width, h text height)
Top Overlay:
  text "F1" at 1380,2790 h10
Drill Drawing:
  lines w2.51: 2140,1560 2175,1525

## Text inside footprints (layer, text, board x,y; h text height)
C2: Top Layer "C1" at 1909.71,1230.63 h15.75 r180
C4: Top Layer "C1" at 1438.06,1775.63 h15.75 r180
C5: Top Layer "C1" at 1438.06,1705.63 h15.75 r180
C6: Top Layer "C1" at 1438.06,1630.63 h15.75 r180
C7: Top Layer "C1" at 1438.06,1555.63 h15.75 r180
C8: Top Layer "C1" at 1438.06,1480.63 h15.75 r180
C10: Top Layer "C1" at 1730.63,2262.3 h15.75 r90
C12: Top Layer "C1" at 1780.63,2052.3 h15.75 r90
C34: Top Layer "C1" at 2274.37,2569.71 h15.75 r270
C44: Bottom Layer "C1" at 2257.3,1580.63 h15.75 r180